# Altium PCB Current Sensing PCB.PcbDoc
Units mil, origin at the board's own origin, x right, y up, seen from the top; angles counter-clockwise.
Board outline 2005.03 x 2000.03 mil, 2 copper layers (Top Layer, Bottom Layer); 56 components, 33 nets, 182 pads, 29 vias.
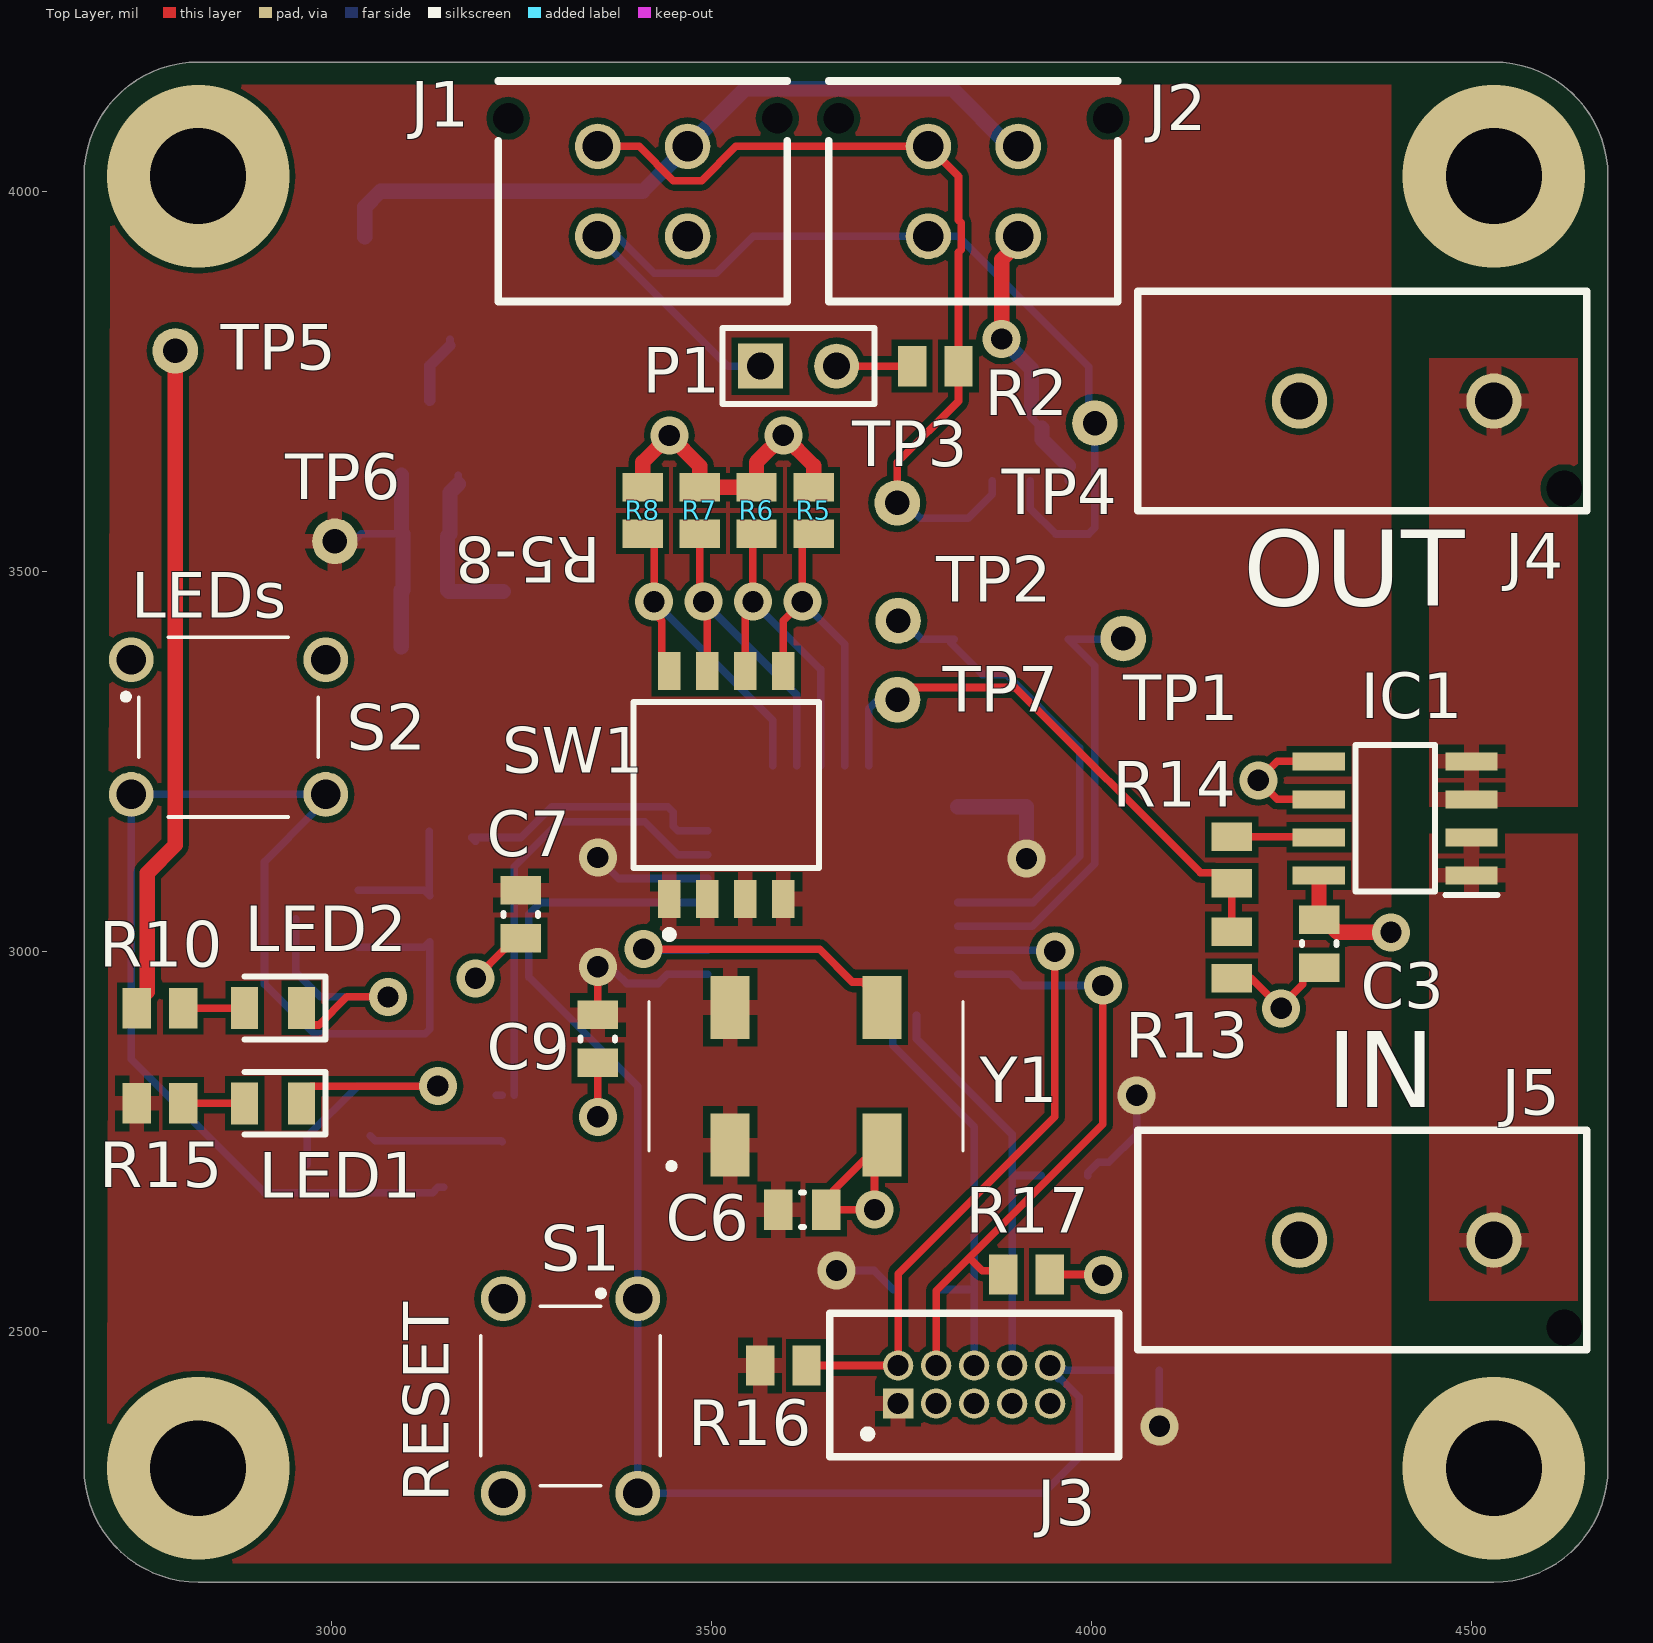
[diagram p0: Top Layer view]
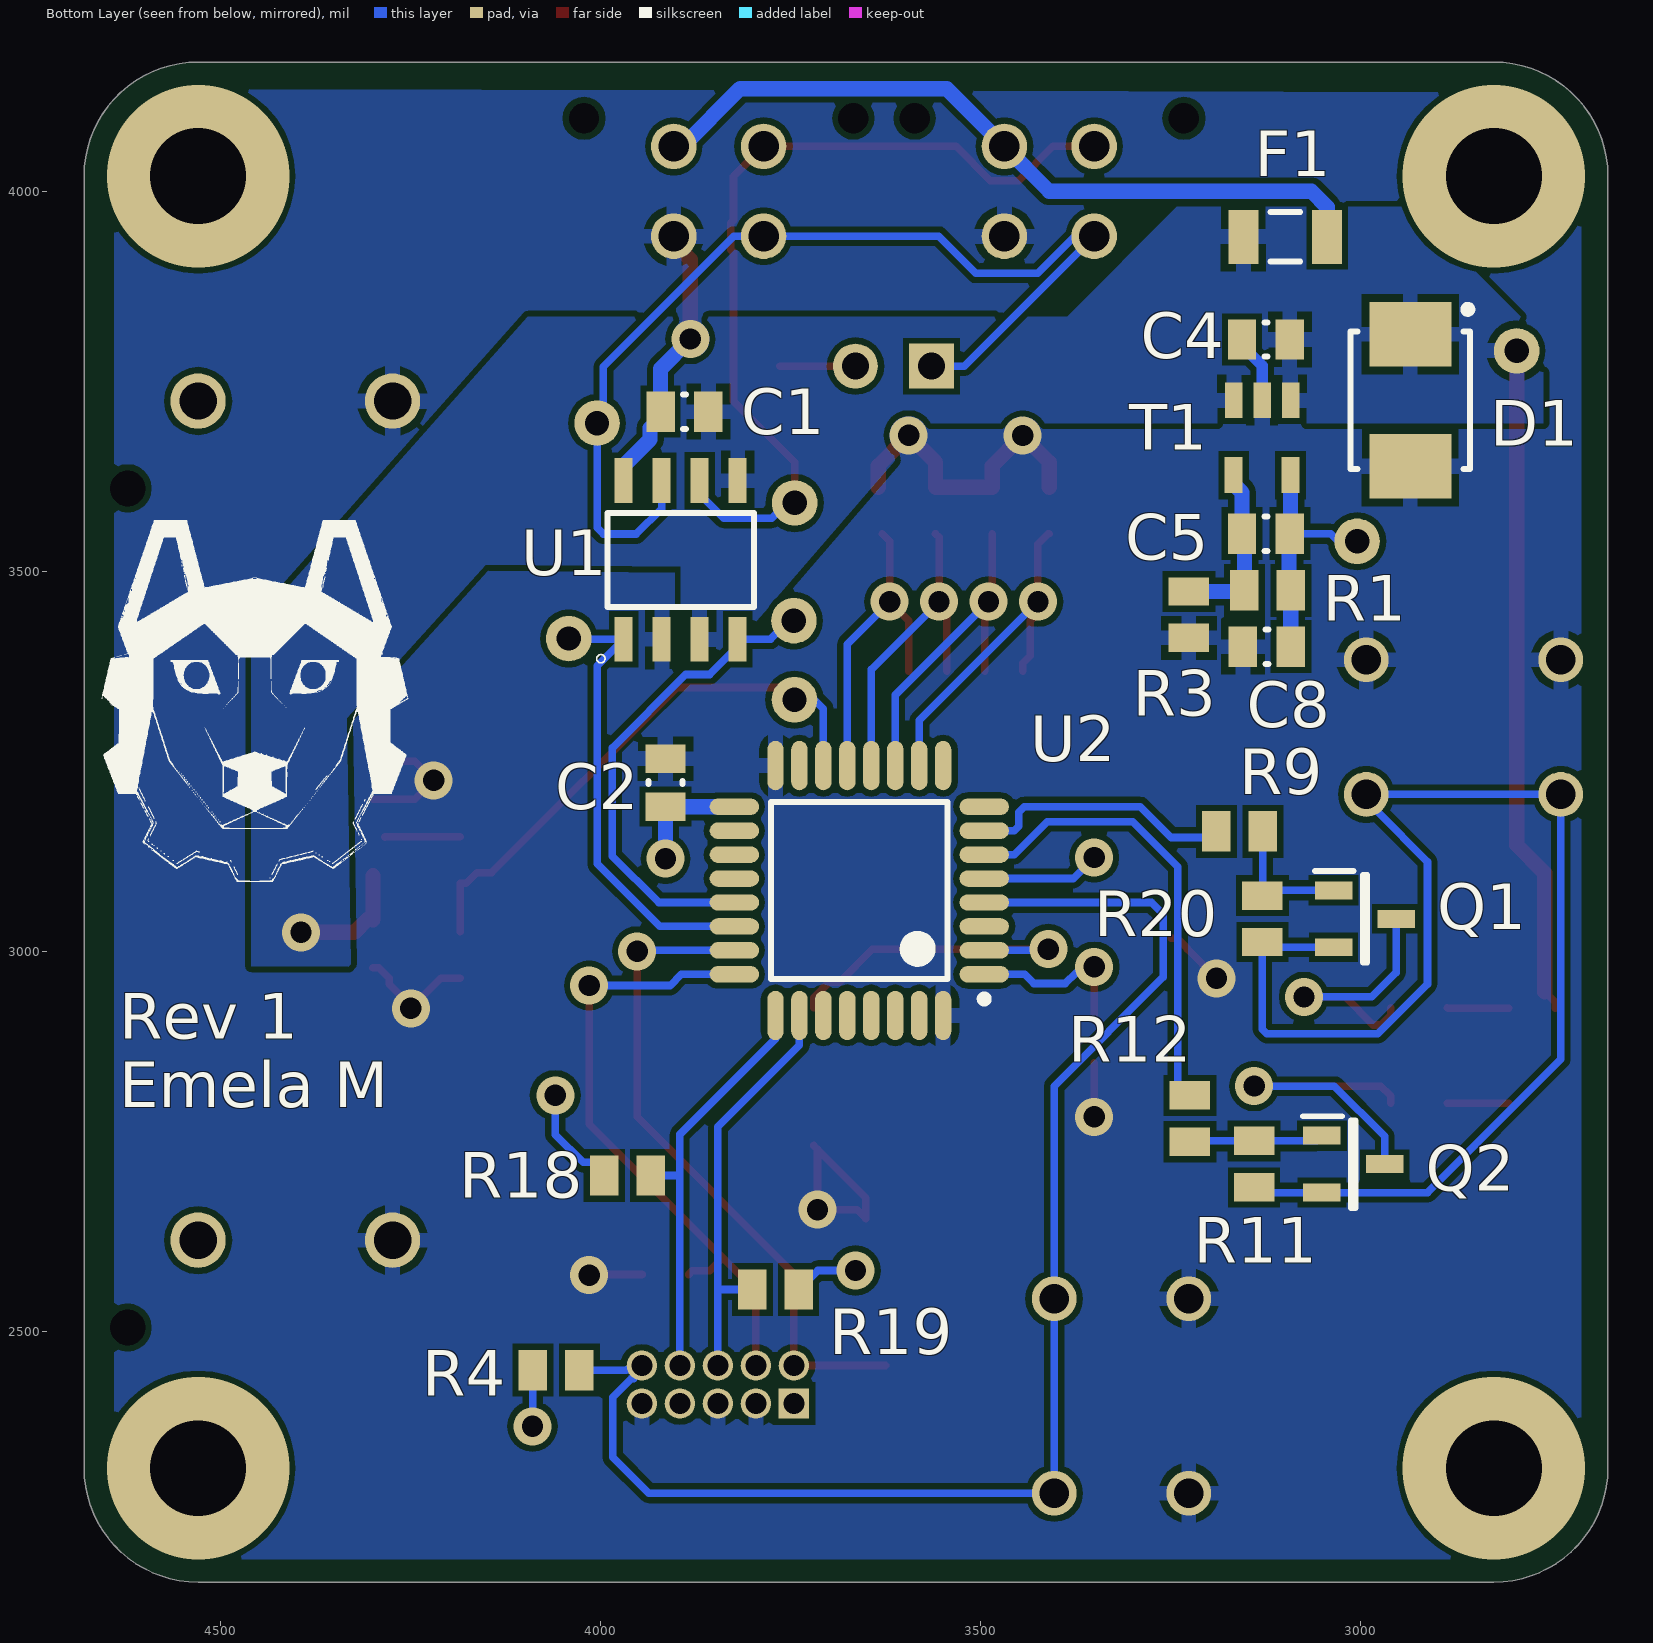
[diagram p1: Bottom Layer view, seen from below]

## Layer stack, top to bottom
Top Solder: solder mask 0.4, Solder Resist, Dk 3.5
Top Layer: signal copper 1.4
Dielectric 1: dielectric 12.6, FR-4, Dk 4.8
Bottom Layer: signal copper 1.4
Bottom Solder: solder mask 0.4, Solder Resist, Dk 3.5

## Board outline
2675,2320 ccw(c2825,2320) 2825,2170 4530,2170 ccw(c4530,2320) 4680,2320 4680,4020 ccw(c4530,4020) 4530,4170 2825.03,4170 2825,4170.03 ccw(c2825,4020) 2674.97,4020 2675,4019.97

## Design rules (kind name [scope] priority, off if disabled: settings)
BoardOutlineClearance [All] p1: gap=7.87 ignorepadtopadclearanceinfootprint=FALSE except(15.75: Arc-SplitBarrior Arc-SplitContinuation Track-SplitBarrior Track-SplitContinuation SMDPad-SplitBarrior SMDPad-SplitContinuation THPad-SplitBarrior THPad-SplitContinuation Via-SplitBarrior Via-SplitContinuation Fill-SplitBarrior Fill-SplitContinuation Poly-SplitBarrior Poly-SplitContinuation Region-SplitBarrior Region-SplitContinuation Text-SplitBarrior Text-SplitContinuation)
Clearance "Clearance Bottom Layer" [OnLayer('Bottom Layer')] p1: gap=8 ignorepadtopadclearanceinfootprint=TRUE except(10: Arc-Text Track-Text SMDPad-Text THPad-Text Via-Text Fill-Text Poly-Text Region-Text Text-Text)
Clearance "Clearance Top Layer" [OnLayer('Top Layer')] p2: gap=8 ignorepadtopadclearanceinfootprint=TRUE except(10: Arc-Text Track-Text SMDPad-Text THPad-Text Via-Text Fill-Text Poly-Text Region-Text Text-Text)
Clearance [All] p3: gap=7.87 ignorepadtopadclearanceinfootprint=FALSE except(3.5: Arc-Arc Arc-Track Arc-SMDPad Track-Track Track-SMDPad SMDPad-SMDPad; 5: Arc-Via Track-Via SMDPad-Via THPad-Via Via-Via; 10: Arc-Text Track-Text SMDPad-Text THPad-Text Via-Text Fill-Text Poly-Text Region-Text Text-Text)
HoleSize [All] p1: absolutevalues=TRUE maxlimit=248.03 minlimit=7.87 maxpercent=80.000 minpercent=20.000
MinimumAnnularRing [All] p1: minimumring=3
MinimumSolderMaskSliver [All] p1: minsoldermaskwidth=3.94
PolygonConnect PolygonConnect_1 [All] p1: thpad.connectstyle=Relief thpad.reliefconductorwidth=20 thpad.reliefentries=4 thpad.polygonreliefangle="90 Angle" thpad.airgapwidth=10 smdpad.connectstyle=Relief smdpad.reliefconductorwidth=20 smdpad.reliefentries=4 smdpad.polygonreliefangle="90 Angle" smdpad.airgapwidth=10 via.connectstyle=Direct via.reliefconductorwidth=20 via.reliefentries=4 via.polygonreliefangle="90 Angle" via.airgapwidth=10
RoutingCorners [All] p1: cornerstyle=Round minsetback=100 maxsetback=100
RoutingVias [All] p1: holewidth=19.68 width=39.37 viastyle="Through Hole" minholewidth=7.87 minwidth=17.72 maxholewidth=39.37 maxwidth=78.74
SilkToSilkClearance [All] p1: silktosilkclearance=3.94
SilkToSolderMaskClearance [IsPad] p1: minsilkscreentomaskgap=3.94 clearancetoexposedcopper=TRUE
SolderMaskExpansion [All] p1: expansion=4
Width [All] p1: maxlimit=100 minlimit=3.5 preferedwidth=15
25 further rules are at their usual default settings.

## Classes and differential pairs
component class "STM Schematic": C2 C6 C7 C9 J3 R4 R16 R17 R18 R19 S1 U2 Y1
component class "Current Sense Schematic": C3 IC1 J4 J5 R13 R14 TP7
component class "CAN Schematic": C1 D1 F1 J1 J2 P1 R2 R5 R6 R7 R8 SW1 TP1 TP2 TP3 TP4 U1
component class "Power Schematic": C4 C5 C8 DS1 DS2 LED1 LED2 Q1 Q2 R1 R3 R9 R10 R11 R12 R15 R20 S2 T1 TP5 TP6

## Components (designator, comment, footprint, x,y, rotation, side; value= is the part's Value field where it differs from the comment)
C1 "CAP 0.1uF" CAPC0805(2012)75_L 3890,3710 r180 bottom value=2.7pF
C2 "0.1uF" CAPC0805(2012)75_L 3915,3221.81 r270 bottom value=2.7pF
C3 "CAP 0.1uF" CAPC0805(2012)75_L 4300,3010 r90 top value=2.7pF
C4 "1uF" CAPC0805(2012)75_L 3125,3805 r180 bottom value=2.7pF
C5 "CAP 390pF" CAPC0805(2012)75_L 3125,3549.49 r180 bottom value=2.7pF
C6 "0.1uF" CAPC0805(2012)75_L 3620,2660 r180 top value=2.7pF
C7 "0.1uF" CAPC0805(2012)75_L 3249.7,3048.71 r90 top value=2.7pF
C8 "CAP 1uF" CAPC0805(2012)75_L 3123.75,3400.84 r180 bottom value=2.7pF
C9 "0.1uF" CAPC0805(2012)75_L 3350.94,2884.76 r90 top value=2.7pF
D1 "1SMB5917BT3G" ONSC-SMB-2-403A-03_H_V 2935,3725 r270 bottom
F1 "1206L020YR" LFUS-1206L020YR_V 3099.49,3940 r0 bottom
IC1 "ACS723LLCTR-40AU-T" SOT127P600X175-8N 4400,3175 r180 top
J1 "0430450427" 0430450427 3410,4000 r180 top
J2 "0430450427" 0430450427 3845,4000 r180 top
J3 "SAMTEC-FTSH-105-01-X-D" SAMTEC-FTSH-105-01-X-D 3746.02,2405 r0 top
J4 "1510482204" 1510482204 4061.5,3868.54 r270 top
J5 "1510482204" 1510482204 4061.5,2764.49 r270 top
LED1 "150080BS75000" LEDC2012X80N 2923.58,2925.55 r180 top
LED2 "150080BS75000" LEDC2012X80N 2923.58,2800 r180 top
P1 "Header 2" HDR1X2 3565,3770 r0 top
Q1 "NTR5103NT1G" SOT95P237X101-3N 2994.61,3042.76 r180 bottom
Q2 "NTR5103NT1G" SOT95P237X101-3N 3010,2720 r180 bottom
R1 "56.2K" RESC2013X70X40LL20T20 3122.72,3475 r0 bottom
R2 "120" RESC2013X70X40LL20T20 3795,3770 r0 top
R3 "18K" RESC2013X70X40LL20T20 3226.42,3442.94 r270 bottom
R4 "10k" RESC2013X70X40LL20T20 4058.9,2448.84 r180 bottom
R5 "10k" RESC2013X70X40LL20T20 3635,3580 r90 top
R6 "10k" RESC2013X70X40LL20T20 3559.76,3580 r90 top
R7 "10k" RESC2013X70X40LL20T20 3485,3580 r90 top
R8 "10k" RESC2013X70X40LL20T20 3410,3580 r90 top
R9 "100" RESC2013X70X40LL20T20 3159.61,3157.76 r180 bottom
R10 "330" RESC2013X70X40LL20T20 2775,2925 r180 top
R11 "10k" RESC2013X70X40LL20T20 3140.51,2720 r270 bottom
R12 "100" RESC2013X70X40LL20T20 3225,2780 r270 bottom
R13 "24k" RESC2013X70X40LL20T20 4185,2995 r270 top
R14 "5.1k" RESC2013X70X40LL20T20 4185,3120 r270 top
R15 "330" RESC2013X70X40LL20T20 2775,2800 r0 top
R16 "10k" RESC2013X70X40LL20T20 3595,2455 r0 top
R17 "10k" RESC2013X70X40LL20T20 3915,2574.78 r180 top
R18 "10k" RESC2013X70X40LL20T20 3965,2705 r180 bottom
R19 "10k" RESC2013X70X40LL20T20 3770.24,2555 r0 bottom
R20 "10k" RESC2013X70X40LL20T20 3129.61,3042.76 r270 bottom
S1 "1825910-7" "Switch 6mm 24V (NO)" 3315,2415 r270 top
S2 "1825910-7" "Switch 6mm 24V (NO)" 2865,3295 r0 top
SW1 "TDA04H0SB1" CKCP-TDA04H0SB1R_V 3520,3218.79 r90 top
T1 "AP2127K-4.75TRG1" SOT95P282X145-5N 3130,3675.79 r270 bottom
TP1 "Test Point" "Test Point Through-hole" 4022.17,3386.5 r0 top
TP2 "Test Point" "Test Point Through-hole" 3771.02,3415 r90 top
TP3 "Test Point" "Test Point Through-hole" 3770,3570 r90 top
TP4 "Test Point" "Test Point Through-hole" 4030,3675 r90 top
TP5 "Test Point" "Test Point Through-hole" 2820,3770 r90 top
TP6 "Test Point" "Test Point Through-hole" 3030,3519.49 r90 top
TP7 "Test Point" "Test Point Through-hole" 3770.24,3311 r90 top
U1 "MCP2562-E/SN" SOIC127P600X175-8N 3895,3515 r90 bottom
U2 "STM32F334K6T6" STM-LQFP32_N 3660,3080 r0 bottom
Y1 "SG-636PCW_50.0000MC3" SG-636 3625,2835.55 r0 top

## Footprints (in the part's own frame and the unit in brackets; to place one, negate y for a bottom-side part, rotate by r counter-clockwise, add the part's x,y. Pads: shape width x height; smd on the part's side, far side on the other; paste and mask are expansions set on the pad)
0430450427 [mil] "Molex micro-fit 3.0 4 pos"
  round 60 hole 40: 1(-59.06,59.06) 2(-59.06,-59.06) 3(59.06,59.06) 4(59.06,-59.06)
  round 0 hole 40 unplated: 7(177.17,-96.06) ""(-177.17,-96.06)
  silkscreen extent -190,-145 190,145
1510482204 [mm] "Molex 6.5MM 2 pin connector, used for power connections. P/N 1510482204 and similar models."
  round 1.85 hole 1.25: 1(3.67,5.4) 2(3.67,11.9)
  round 0 hole 1.2 unplated: 9(6.59,14.25)
  Top Layer region: 4.826,3.175
  silkscreen extent 0,0 7.34,15
CAPC0805(2012)75_L [mm] "Chip Capacitor, Body 2.0x1.2mm, Height 0.75mm, IPC High Density"
  rect 0.95x1.35 smd: 1(-0.8,0) 2(0.8,0)
  silkscreen extent -0.05,-0.58 0.05,0.58, body extent -1.1,-0.72 1.1,0.72, height 0.75
CKCP-TDA04H0SB1R_V [mm] "SMD, 8-Leads, Body 6.21x6.2mm, Pitch 1.27mm"
  rect 1.27x0.76 smd: 1(-3.81,1.905) 2(-3.81,0.635) 3(-3.81,-0.635) 4(-3.81,-1.905) 5(3.81,-1.905) 6(3.81,-0.635) 7(3.81,0.635) 8(3.81,1.905)
  silkscreen extent -5.12,-3.11 2.78,3.11, body extent -4.06,-3.1 4.06,3.11, height 2.3
HDR1X2 [mm] "Connector; Header; 2 Position"
  rect 1.5x1.5 hole 0.9: 1(0,0)
  round 1.5 hole 0.9: 2(2.54,0)
  silkscreen extent -1.27,-1.27 3.81,1.27
LEDC2012X80N [mm]
  rect 0.9x1.4 smd: 1(-0.95,0) 2(0.95,0)
  silkscreen extent -1.75,-1.05 0.95,1.05
LFUS-1206L020YR_V [mm] "SMD, 2-Leads, Body 3.2x1.65mm"
  rect 1x1.8 smd: 1(-1.4,0) 2(1.4,0)
  silkscreen extent -0.5,-0.82 0.5,0.82, body extent -1.6,-0.82 1.6,0.82, height 1
ONSC-SMB-2-403A-03_H_V [mil] "Molded, 2-Leads, Body 4.6x3.95mm"
  rect 85x107.99 smd: 1(-87.01,0) 2(87.01,0)
  silkscreen extent -125,-79 91,81, body extent -91,-78 91,78, height 95
RESC2013X70X40LL20T20 [mm] "Chip Resistor, 2-Leads, Body 2.00x1.25mm, IPC High Density"
  rect 0.95x1.35 smd: 1(-0.775,0) 2(0.775,0)
  body extent -1.1,-0.72 1.1,0.72, height 0.7
SAMTEC-FTSH-105-01-X-D [mil] "SAMTEC-FTSH-105-01-X-D Shrouded .05in pitch header"
  rect 40x40 hole 28 mask+3: 1(0,0)
  round 40 hole 28 mask+3: 2(0,50) 3(50,0) 4(50,50) 5(100,0) 6(100,50) 7(150,0) 8(150,50) 9(200,0) 10(200,50)
  silkscreen extent -90,-70 290,119
SG-636 [mm]
  rect 1.3x2.1 smd: 1(-2.54,-2.3) 2(2.54,-2.3) 3(2.54,2.3) 4(-2.54,2.3)
  silkscreen extent -5.25,-3.1 5.25,2.5
SOIC127P600X175-8N [mm]
  rect 1.5x0.6 smd: 1(-2.65,1.905) 2(-2.65,0.635) 3(-2.65,-0.635) 4(-2.65,-1.905) 5(2.65,-1.905) 6(2.65,-0.635) 7(2.65,0.635) 8(2.65,1.905)
  silkscreen extent -3.44,-2.45 1.58,2.81
SOT95P237X101-3N [mm]
  rect 1.25x0.6 smd: 1(-1.05,0.95) 2(-1.05,-0.95) 3(1.05,0)
  silkscreen extent -1.68,-1.46 0.08,1.6, body extent -1.18,-1.46 1.19,1.46, height 1.01
SOT95P282X145-5N [mil]
  rect 47.24x23 smd: 1(-49.21,37.4) 2(-49.21,0) 3(-49.21,-37.4)
  rect 47.24x23.62 smd: 4(49.21,-37.4) 5(49.21,37.4)
SOT127P600X175-8N [mm]
  rect 1.75x0.6 smd: 1(-2.55,1.905) 2(-2.55,0.635) 3(-2.55,-0.635) 4(-2.55,-1.905) 5(2.55,-1.905) 6(2.55,-0.635) 7(2.55,0.635) 8(2.55,1.905)
  silkscreen extent -3.42,-2.45 1.33,2.56, body extent -3,-2.45 3,2.45, height 1.75
STM-LQFP32_N [mm] "QFP, 32-Leads, Body 7x7mm, Pitch 0.8mm, IPC Medium Density"
  oval 1.65x0.55 smd: 1(-4.175,2.8) 2(-4.175,2) 3(-4.175,1.2) 4(-4.175,0.4) 5(-4.175,-0.4) 6(-4.175,-1.2) 7(-4.175,-2) 8(-4.175,-2.8) 17(4.175,-2.8) 18(4.175,-2) 19(4.175,-1.2) 20(4.175,-0.4) 21(4.175,0.4) 22(4.175,1.2) 23(4.175,2) 24(4.175,2.8)
  oval 0.55x1.65 smd: 9(-2.8,-4.175) 10(-2,-4.175) 11(-1.2,-4.175) 12(-0.4,-4.175) 13(0.4,-4.175) 14(1.2,-4.175) 15(2,-4.175) 16(2.8,-4.175) 25(2.8,4.175) 26(2,4.175) 27(1.2,4.175) 28(0.4,4.175) 29(-0.4,4.175) 30(-1.2,4.175) 31(-2,4.175) 32(-2.8,4.175)
  silkscreen extent -4.3,-2.95 2.95,3.75, body extent -3.5,-3.5 3.5,3.5, height 1.6
"Switch 6mm 24V (NO)" [mm]
  round 1.498 hole 0.99: 1(-3.25,2.25) 2(3.25,2.25) 3(-3.25,-2.25) 4(3.25,-2.25)
  silkscreen extent -3.53,-3 3,3
"Test Point Through-hole" [mil]
  round 60 hole 32: 1(20,25)

## Part data
C1 C2 C3 C4 C5 C6 C7 C8 C9: library part CMP-1036-00339-1, "CAP 2.7pF 50V ±0.1pF 0805 (2012 Metric) Thickness 0.75mm SMD", Case-EIA=0805, Case-Metric=2012, Rated Voltage="50 V", Tolerance=±0.1pF, Max Thickness="0.75 mm", Technology=SMT
D1: library part CMP-1060-00195-1, "3 W Zener Voltage Regulator, 2-Pin SMB, Pb-Free, Tape and Reel", Manufacturer="On Semiconductor", ComponentLink1Description="Manufacturer URL", ComponentLink1URL=http://www.onsemi.com/, ComponentLink2Description=Datasheet, ComponentLink2URL=http://www.onsemi.com/pub_link/Collateral/1SMB5913BT3-D.PDF, ComponentLink3Description="Package Specification", ComponentLink3URL=http://www.onsemi.com/pub_link/Collateral/1SMB5913BT3-D.PDF, DatasheetVersion="Rev. 8", Mounting Technology="Surface Mount", PackageDescription="2-Pin Small Molded Package, J-Bend Lead, Body 4.33 x 3.625 mm", PackageReference=SMB-2-403A-03_H, PackageVersion="Rev. H, 05/2011", Packing="Tape and Reel", PartNumber=1SMB5917BT3G, RoHS=Pb-Free, VZ Typ (V)=4.7
F1: library part CMP-2000-05472-1, "PTC Resettable Fuse, 100 A, 0.6W, -40 to 85 degC, 2-Pin SMD, RoHS, Tape and Reel", Hold Current [Ih]=0.2A, Manufacturer=Littelfuse, Operating Temp Range=-40to+85°C, Package Description="2-Pin Surface Mount Device, Body 3.2 x 1.65 mm", Trip Current=0.42A, Working Voltage-Max=24V, Datasheet URL=http://download.siliconexpert.com/pdfs/2015/4/10/21/0/43/983/ltf_/manual/3609284120511713636092822459449496littelfuse_ptc_1206l_datasheet.pdf.pdf.pdf, Datasheet Version=02/2015, Manufacturer URL=http://www.littelfuse.com/, Mounting Technology=SurfaceMount, Package Reference=1206L020YR, Size=1206
IC1: "Integrated Circuit", Manufacturer_Name="Allegro Microsystems", Datasheet Link=http://www.allegromicro.com/~/media/Files/Datasheets/ACS723-Datasheet.ashx, Height=1.75mm, Manufacturer_Part_Number=ACS723LLCTR-40AU-T
J1 J2: library part "0430450427-Single row schematic", "Molex micro-fit 3.0 dual row header. P/N 0430450427"
J4 J5: "Molex 6.5MM 2 pin connector, used for power connections. P/N 1510482204 and similar models."
LED1 LED2: "LED", Manufacturer_Name="Wurth Elektronik", Mouser Part Number=710-150080BS75000, RS Part Number=8154228P, Datasheet Link=https://katalog.we-online.com/led/datasheet/150080BS75000.pdf, Height=0.8mm, Manufacturer_Part_Number=150080BS75000, Mouser Price/Stock=https://www.mouser.com/Search/Refine.aspx?Keyword=710-150080BS75000, RS Price/Stock=http://uk.rs-online.com/web/p/products/8154228P
P1: "Header, 2-Pin", LatestRevisionDate=17-Jul-2002, LatestRevisionNote="Re-released for DXP Platform.", Publisher="Altium Limited"
Q1 Q2: "N-MOSFET", Manufacturer_Name="ON Semiconductor", Mouser Part Number=863-NTR5103NT1G, RS Part Number=1841331, Datasheet Link=https://componentsearchengine.com/Datasheets/1/NTR5103NT1G.pdf, Height=1.01mm, Manufacturer_Part_Number=NTR5103NT1G, Mouser Price/Stock=https://www.mouser.com/Search/Refine.aspx?Keyword=863-NTR5103NT1G, RS Price/Stock=http://uk.rs-online.com/web/p/products/1841331
R1 R2 R3 R4 R5 R6 R7 R8 R9 R10 R11 R12 R13 R14 R15 R16 R17 R18 R19 R20: library part CMP-2001-04440-2, "RES SMD 150K OHM 1% 1/8W 0805", Manufacturer=Panasonic, Part Number=ERJ-6ENF1503V, Datasheet=http://industrial.panasonic.com/cdbs/www-data/pdf/RDA0000/AOA0000C86.pdf
S1 S2: library part "Switch 6mm 24V (NO)", "FSM4JAH=6MM TACT SWITCH, HIGH TEMP", Contact_Current_Rating="50 mA", Package=None, Configuration_Pole-Throw="Single Pole - Single Throw", Digi-Key_Part_Number=450-1804-ND, Digi-Key_Purchase_URL=https://www.digikey.com/product-detail/en/te-connectivity-alcoswitch-switches/1825910-7/450-1804-ND/1731414?utm_source=snapeda&utm_medium=aggregator&utm_campaign=symbol, EU_RoHS_Compliance=Compliant, MF="TE Connectivity", MP=1825910-7, SnapEDA_Link=https://www.snapeda.com/parts/1825910-7/TE%20Connectivity%20ALCOSWITCH%20Switches/view-part/?ref=snap, TE_purchase_URL=https://www.te.com/usa-en/product-1825910-7.html?te_bu=Cor&te_type=disp&te_campaign=seda_glo_cor-seda-global-disp-prtnr-fy19-seda-model-bom-cta_sma-317_1&elqCampaignId=32493
SW1: library part "SMD Half-Pitch Dip Switch Array", "Ultra-Miniature Surface Mount Half-Pitch DIP Switch, 25 mA, 24 V, -40 to 85 degC, 8-Pin SMD, RoHS, Tube", Case\Package=DIP, Contact Current Rating="100 mA", Max Contact Resistance="100 mohm", Max Current Rating="25 mA", Max Operating Temperature="85 degC", Max Voltage Rating (DC)="24 V", Min Operating Temperature="-40 degC", Package Quantity=70, ComponentLink1Description=Datasheet, ComponentLink1URL=http://www.ck-components.com/media/1328/tda.pdf, Contact Finish=Gold, Contact Material=Copper, Contact Plating=Gold, Current Rating="100 mA", DatasheetVersion=02/2016, Height="2.3 mm", Lead Pitch="1.27 mm", Length="6.21 mm", Mount="Surface Mount", Mounting Technology="Surface Mount", PackageDescription="8-Pin Surface Mount Device, Body 6.21 x 6.2 mm, Pitch 1.27 mm", PackageReference=TDA04H0SB1R, Packaging=Rail/Tube, Pins=4, Radiation Hardening=No, REACH SVHC="No SVHC", RoHSCompliant=true, Throw Configuration=SPST, Voltage Rating (DC)="24 V"
T1: "LDO Voltage Regulators 300mA CMOS LDO 2.5V to 6VSource:  Datasheet", Manufacturer_Name="Diodes Inc.", Package=SOT95P282X145-5N, DeviceSetName=AP2127K-4.75TRG1, GateName_1=G$1, Height=1.45mm, LibraryName=AP2127K-4.75TRG1, Manufacturer_Part_Number=AP2127K-4.75TRG1, SymbolName_1=AP2127K-4.75TRG1
U1: "Microchip MCP2562-E/SN, CAN Transceiver 1MBps 1-channel IEC 61000-4-2, 8-Pin SOIC", Package="SO-8 Microchip", Availability=Unavailable, MF=Microchip, MP=MCP2562-E/SN, Price=None, SnapEDA_Link=https://www.snapeda.com/parts/MCP2562-E/SN/Microchip/view-part/?ref=snap
U2: "ARM Cortex-M4 32-bit MCU, 32-Pin LQFP, 32 KB Flash, 16 KB Internal RAM, 25 I/Os, -40 to 85 degC, Tray", I/Os (High Current)=25, Operating Frequency(F) (Processor speed) (MHz)=72, Package Description="32-Pin Low Profile Quad Flat Package, 7 x 7 mm Body, 0.8 mm Pitch", Package Reference=LQFP32, Supply Voltage(Vcc) min (V)=2, ComponentLink1Description="Manufacturer URL", ComponentLink1URL=http://www.st.com/, ComponentLink2Description=Datasheet, ComponentLink2URL=http://www.st.com/st-web-ui/static/active/en/resource/technical/document/datasheet/DM00097745.pdf, Core="ARM Cortex-M4", D/A Converter=3, DatasheetVersion="Rev. 4", FLASH Size (Prog) (kB)=32, Internal RAM Size (kB)=16, Mounting Technology="Surface Mount", Packing=Tray
Y1: library part SG-636PCW_50.0000MC3__ROHS, "Standard Clock Oscillators 50MHz 3.3Volt 100ppm -20C +70C", Arrow Part Number="SG-636PCW 50.0000MC3: ROHS", Manufacturer_Name="Epson Timing", Datasheet Link=http://www.mouser.com/ds/2/137/G-636PCE_en-1003252.pdf, Manufacturer_Part_Number="SG-636PCW 50.0000MC3: ROHS"

## Via types
v1: diameter 50, hole 28, Top Layer to Bottom Layer, 25 vias
v2: diameter 240, hole 126, Top Layer to Bottom Layer, 4 vias

## Nets (pads, with @x,y where several pads share a name; then routed paths per layer and width w, separated by ;. In a path a pad name is that pad's centre, name@x,y a point inside that pad or via, vN(x,y) a via of type N, cw(c..) or ccw(c..) an arc to the next point about the centre after c; other vN are vias at no path point)
3V3_IND: R12.1 U2.6 | length 605.5
  Bottom Layer w10: R12.1@3217.13,2810.51 R12.1 ; R12.1@3241.02,2810.51 3241.02,3111.02 3300.5,3170.5 3412.76,3170.5 3456.01,3127.24 U2.6
5V0_IND: R9.1 U2.7 | length 357.7
  Bottom Layer w10: R9.1@3190,3145 3185.3,3149.7 3190,3149.7 3249.7,3149.7 3290.24,3190.24 3443.11,3190.24 3450.15,3183.2 3450.15,3164.6 3456.01,3158.74 U2.7
+3V3: C2.2 C5.2 C6.2 C7.2 C8.2 C9.2 J3.1 R1.1 R4.1 R15.1 R16.1 R18.1 R19.1 SW1.1 SW1.2 SW1.3 SW1.4 T1.5 TP6.1 U2.1 U2.5 U2.17 Y1.1 Y1.4 | length 1175
  Top Layer w10: C9.2 v1(3350.94,2979.63)
  Bottom Layer w10: TP6.1@3005,3515 3039.49,3549.49 C5.2 ; T1.5@3086.54,3620.51 T1.5 ; C5.2@3092.6,3550.9 C5.2@3094.49,3549.02 ; v1(3350.94,2979.63) 3358.6,2971.98 3374.59,2971.98 3388.87,2957.7 3430.43,2957.7 3442.5,2969.76 U2.1 ; v1(3350.94,3123.5) 3378.7,3095.75 U2.5 ; v1(3665,2580) 3714.72,2580 R19.1 ; C2.2@3914.92,3190.24 C2.2 ; R18.1 3995.51,2708.53 4009.21,2722.23 4023.28,2722.23 4060,2758.95 v1(4060,2810.51) ; R4.1 4089.41,2375.59 v1(4090,2375)
  Bottom Layer w20: C8.2 R1.1@3092.25,3475 ; C5.2@3092.6,3550.9 T1.5 ; R1.1@3094.49,3475 C5.2@3094.49,3549.02 ; U2.17 C2.2@3914.92,3190.24 ; v1(3915,3121.81) C2.2
+5V0: C1.2 C3.2 C4.2 D1.1 F1.2 IC1.8 R10.2 T1.1 T1.3 TP5.1 U1.3 U1.5 | length 1045.9
  Top Layer w10: R10.2 2744.49,2932.87 R10.2@2758.19,2946.57 ; IC1.8 IC1.8@4300,3099.61 ; C3.2 C3.2@4307.87,3041.5
  Top Layer w20: R10.2@2758.19,2946.57 2758.19,3103.19 2795,3140 TP5.1 ; C3.2 IC1.8@4300,3099.61 ; C3.2@4307.87,3041.5 4324.37,3025 v1(4394.43,3025)
CAN_ADDR_0: R8.1 SW1.8 U2.10 | length 476.3
  Top Layer w10: R8.1 3411.3,3549.49 3425,3535.79 v1(3425,3460) 3425,3445 3435.04,3434.96 3435.04,3388.79 3445,3378.83 SW1.8
  Bottom Layer w10: v1(3425,3460) 3581.26,3303.74 U2.10
CAN_ADDR_1: R7.1 SW1.7 U2.11 | length 451.3
  Top Layer w10: R7.1 3485,3465 v1(3490,3460) 3495,3455 SW1.7
  Bottom Layer w10: v1(3490,3460) 3612.76,3337.24 U2.11
CAN_ADDR_2: R6.1 SW1.6 U2.12 | length 439.4
  Top Layer w10: SW1.6 3545,3439.18 3555,3449.18 v1(3555,3460) 3555,3544.72 R6.1
  Bottom Layer w10: v1(3555,3460) 3644.25,3370.75 U2.12
CAN_ADDR_3: R5.1 SW1.5 U2.13 | length 433.9
  Top Layer w10: SW1.5 3595,3435 v1(3620,3460) 3620,3539.49 R5.1@3630,3549.49
  Bottom Layer w10: v1(3620,3460) 3675.75,3404.25 U2.13
CAN_RX: TP2.1 U1.4 U2.21 | length 646.1
  Bottom Layer w10: TP2.1 3752.55,3435 3776.88,3410.67 3815.14,3410.67 U1.4 3815.14,3405.81 3856.68,3364.27 3888.23,3364.27 3985,3267.5 3985,3125.39 3923.86,3064.25 U2.21
CAN_TX: TP1.1 U1.1 U2.22 | length 597.4
  Bottom Layer w10: U2.22 3922.76,3032.76 4005,3115 4005,3375.67 U1.1 4041.34,3410.67 TP1.1
current_sense: R13.1 R14.2 TP7.1 U2.14 | length 728.8
  Top Layer w10: TP7.1@3745.24,3347.05 3900.12,3347.05 4143.98,3103.19 4163.43,3103.19 4177.13,3089.49 R14.2 R13.1
  Bottom Layer w10: U2.14 3707.24,3319.29 TP7.1@3737.95,3350
GND: C1.1 C2.1 C3.1 C4.1 C6.1 C7.1 C8.1 C9.1 D1.2 IC1.5 IC1.6 J1.1 J2.1 J3.3 J3.5 J3.9 J4.1 J5.1 R3.2 R5.2 R6.2 R7.2 R8.2 R13.2 R17.1 S1.3 S1.4 S2.1 S2.2 T1.2 U1.2 U1.8 U2.16 U2.32 Y1.2 | length 1685.5
  Top Layer w10: v1(3190,2964.49) 3228.12,3002.61 3228.12,3003.51 3241.83,3017.21 C7.1 ; v1(3350.94,2782.19) C9.1 ; v1@3707.5,2652.5 3700,2660 3662.99,2660 3651.5,2648.5 C6.1 3651.5,2675.94 Y1.2@3715,2739.45 ; v1(3715,2660) Y1.2@3715,2739.45 ; Y1.2@3720,2744.45 Y1.2@3715,2739.45 ; J2.1@3904.06,3931.79 J2.1 ; R17.1 4014.42,2574.78 v1(4015.36,2573.84) ; R13.2 4210.51,2964.49 v1(4250,2925) 4250,2928.5 4278.43,2956.93 4278.43,2964.8 4292.13,2978.5 C3.1 ; 4264.46,3250 4245,3250 v1(4220,3225) 4245,3200 IC1.6 ; IC1.5@4278.09,3250 IC1.5 IC1.5@4300,3250
  Top Layer w20: R8.2 3410,3643.54 v1(3445,3678.54) 3485,3638.54 R7.2 R6.2 3559.76,3643.6 v1(3595,3678.83) 3635,3638.83 R5.2 ; v1(3882.35,3805.53) 3882.35,3910.09 J2.1@3904.06,3931.79
  Bottom Layer w10: C4.1@3156.5,3797.13 C4.1 ; C1.1 3921.5,3702.13 C1.1@3935.2,3688.43 ; U1.8 U1.8@3970,3638.56
  Bottom Layer w15: T1.2 3130,3770.63 C4.1@3156.5,3797.13
  Bottom Layer w20: v1(3882.35,3805.53) 3921.5,3766.39 C1.1 ; C1.1@3935.2,3688.43 3935.2,3673.37 U1.8@3970,3638.56
NetC5_1: C5.1 R1.2 R3.1 T1.4 | length 231.3
  Bottom Layer w10: R1.2 R1.2@3154.77,3473.45 ; C5.1@3153.23,3546.22 C5.1 ; T1.4@3167.4,3614.77 T1.4
  Bottom Layer w20: R1.2 C5.1@3153.23,3546.22 ; R1.2@3154.77,3473.45 R3.1 ; C5.1 3156.5,3603.86 T1.4@3167.4,3614.77
NetF1_1: F1.1 J1.2 J2.2 | length 995
  Bottom Layer w20: F1.1 3044.37,3979.37 3065,4000 3410,4000 J1.2 3545,4135 3816.74,4135 3892.69,4059.06 J2.2
NetIC1_1: IC1.1 IC1.2 J5.2
NetIC1_3: IC1.3 IC1.4 J4.2
NetIC1_7: IC1.7 R14.1 | length 99.8
  Top Layer w10: R14.1 4284.09,3150.51 IC1.7@4284.61,3150
NetJ1_3: J1.3 J2.3 P1.1 TP4.1 U1.7 | length 1396.4
  Bottom Layer w10: P1.1 3521.89,3770 J1.3 3376.24,3940.94 3425,3892.19 3506.69,3892.19 3555.45,3940.94 J2.3 3824.95,3940.94 3996.63,3769.26 3996.63,3703.37 TP4.1 4005,3557.36 3996.78,3549.14 3953.42,3549.14 3920,3582.56 U1.7
NetJ1_4: J1.4 J2.4 R2.2 TP3.1 U1.6 | length 1158
  Top Layer w10: J1.4 3405.42,4059.06 3450.42,4014.06 3487.69,4014.06 3532.69,4059.06 J2.4 3825.51,4019.49 3825.51,3962.19 3828.94,3958.76 3828.94,3923.13 3825.51,3919.7 R2.2 3825.51,3724.06 3745,3643.54 TP3.1
  Bottom Layer w10: TP3.1 3755,3590 3775,3570 3838.39,3570 3870,3601.61 U1.6
NetJ3_2: J3.2 R16.2 U2.23 | length 879.2
  Top Layer w10: R16.2 J3.2 3746.02,2576.02 3952.19,2782.19 v1(3952.19,3000)
  Bottom Layer w10: U2.23 3950.93,3001.26 v1(3952.19,3000)
NetJ3_4: J3.4 R17.2 U2.24 | length 842
  Top Layer w10: J3.4 3796.02,2553.11 3839.51,2596.59 ; R17.2 3879.81,2579.46 3856.65,2579.46 3839.51,2596.59 ; v1(4015.36,2955) 4015.36,2772.44 3839.51,2596.59
  Bottom Layer w10: U2.24 3894.27,2969.76 3909.03,2955 v1(4015.36,2955)
NetJ3_6: J3.6 R19.2 U2.26 | length 550.3
  Bottom Layer w10: U2.26 3738.74,2876.26 3846.02,2768.98 3846.02,2555 ; R19.2 3846.02,2555 ; J3.6 3846.02,2555
NetJ3_8: J3.8 R18.2 U2.25 | length 551.2
  Bottom Layer w10: U2.25 3770.24,2884.76 3896.02,2758.98 3896.02,2705 ; J3.8 3896.02,2705 ; R18.2 3896.02,2705
NetJ3_10: J3.10 R4.2 S1.1 S1.2 U2.4 | length 1886.9
  Bottom Layer w10: U2.4 3275.54,3064.25 3260,3048.71 3260,2966.26 3403.58,2822.68 S1.1 S1.2 3937.05,2287.05 3984.61,2334.61 3984.61,2413.08 3959.69,2438 3956.86,2438 3948.68,2446.18 3946.02,2448.84 J3.10 3949.1,2451.92 3951.76,2449.26 3966.46,2449.26 3966.88,2448.84 R4.2
NetLED1_1: LED1.1 Q1.3 | length 349.9
  Top Layer w10: LED1.1 2960.98,2915.71 2973.7,2902.99 2983.54,2902.99 3020.55,2940 v1(3075,2940)
  Bottom Layer w10: Q1.3 2953.66,3042.36 2953.66,2972.17 2985.83,2940 v1(3075,2940)
NetLED1_2: LED1.2 R10.1 | length 80.9
  Top Layer w10: R10.1 2885.63,2925 LED1.2
NetLED2_1: LED2.1 Q2.3 | length 430.7
  Top Layer w10: LED2.1 2960.98,2809.84 2973.7,2822.56 2983.54,2822.56 2983.43,2822.68 v1(3140.51,2822.68)
  Bottom Layer w10: Q2.3 2968.66,2756.5 3034.84,2822.68 v1(3140.51,2822.68)
NetLED2_2: LED2.2 R15.2 | length 80.7
  Top Layer w10: R15.2 LED2.2
NetP1_2: P1.2 R2.1 | length 99.5
  Top Layer w10: P1.2 R2.1
NetQ1_1: Q1.1 R9.2 R20.1 | length 180.5
  Bottom Layer w10: Q1.1 3122.72,3080.16 R20.1@3129.09,3073.78 ; R9.2 R20.1@3129.09,3073.78 ; R20.1 R20.1@3129.09,3073.78
NetQ1_2: Q1.2 Q2.2 R11.2 R20.2 S2.3 S2.4 | length 1825.8
  Bottom Layer w10: S2.4 S2.4@2977.95,3206.42 ; Q1.2 3122.72,3005.35 R20.2 3129.61,2897.51 3123.75,2891.65 2977.64,2891.65 2912.4,2956.89 2912.4,3117.87 2977.95,3183.43 S2.4@2977.95,3206.42 ; R11.2@3148.39,2689.49 R11.2 3133.62,2682.6 Q2.2 2912.4,2682.6 2737.05,2857.95 S2.3 S2.4@2977.95,3206.42
NetQ2_1: Q2.1 R11.1 R12.2 | length 176.9
  Bottom Layer w10: Q2.1 3058.23,2750.51 R11.1 3223.98,2750.51 R12.2
NetU2_2: U2.2 Y1.3 | length 437.1
  Top Layer w10: v1@3410,3000 3411.3,3001.3 v1(3411.3,3002.83) 3642.72,3002.83 3685.93,2959.62 3699.41,2959.62 3720,2939.03 Y1.3@3720,2925.55
  Bottom Layer w10: v1(3411.3,3002.83) 3411.3,3002.52 3412.56,3001.26 U2.2
pads on no net: J1. J1.7 J2. J2.7 J3.7 J4.9 J5.9 U2.3 U2.8 U2.9 U2.15 U2.18 U2.19 U2.20 U2.27 U2.28 U2.29 U2.30 U2.31
copper on no net:
  other v2: 2825,2320 4530,2320 2825,4020 4530,4020

## Polygon pours and split planes (outlines as drawn)
+3V3 on Top Layer "Top Layer-+3V3" (solid, pour order 16): 2705,2195 4395,2195 4395,2205 4395,4140 2710,4140
no net on Top Layer "Top Layer-No Net 1" (solid, pour order 14): 2705,2195
NetIC1_3 on Top Layer "Top Layer-NetIC1_3" (solid, pour order 10): 4445,3190 4640,3190 4640,3780 4455,3780 4445,3780
NetIC1_1 on Top Layer "Top Layer-NetIC1_1" (solid, pour order 8): 4445,2540 4640,2540 4640,3155 4445,3155
no net on Top Layer "Top Layer-No Net" (solid, pour order 4): 2925,4005
GND on Bottom Layer "Bottom Layer-GND" (solid, pour order 12): 2705,4130 2710,4125 2710,2200 4640,2200 4640,2210 4640,4135
+5V0 on Bottom Layer "Bottom Layer-+5V0" (solid, pour order 6): 4095.95,3835 4459.97,3425.08 4460.15,2980.36 4328.72,2979.63 4334.27,3306.6 4271.78,3375.67 4151.5,3508.6 3894.66,3506.21 3894.66,3375.67 3846.02,3375.67 3629.64,3626.57 3570.63,3695 3205,3695 2760,3695 2760,3805 2934.37,3979.37 2985.63,3979.37 3242.32,3979.37 3386.69,3835
no net on Bottom Solder (solid): 3787.05,2947.68 3535,2947.68 3535,2882.68 3787.05,2882.68
no net on Bottom Solder (solid): 3787.05,3280 3535,3280 3535,3215 3787.05,3215
no net on Bottom Solder (solid): 3857.05,3207.13 3787.05,3207.13 3787.05,2955.71 3857.05,2955.71
no net on Bottom Solder (solid): 3530,3206.42 3460,3206.42 3460,2955 3530,2955
no net on Bottom Solder (solid): 3530,3205

## Silkscreen, mask and mechanical layers (free items; w line width, h text height)
Top Overlay:
  text "R5-8" at 3355,3545 h60 r180
  text "OUT" at 4200,3455 h100
  text "LEDs" at 2737.05,3439.18 h60
  text "IN" at 4310,2795 h100
  text "RESET" at 3155,2275 h60 r90
Bottom Overlay:
  drawing of 173 lines, arcs and shapes, not listed
  text "Rev 1 / Emela M" at 4633.57,2795 h60